# Altium PCB PCB_Rev1.PcbDoc
Units mil, origin at the board's own origin, x right, y up, seen from the top; angles counter-clockwise.
Board outline 1450.12 x 1300 mil, 4 copper layers (Top Layer, GND Plane, PWR Plane, Bottom Layer), stack 61.2 mil thick; 49 components, 39 nets, 240 pads, 78 vias.
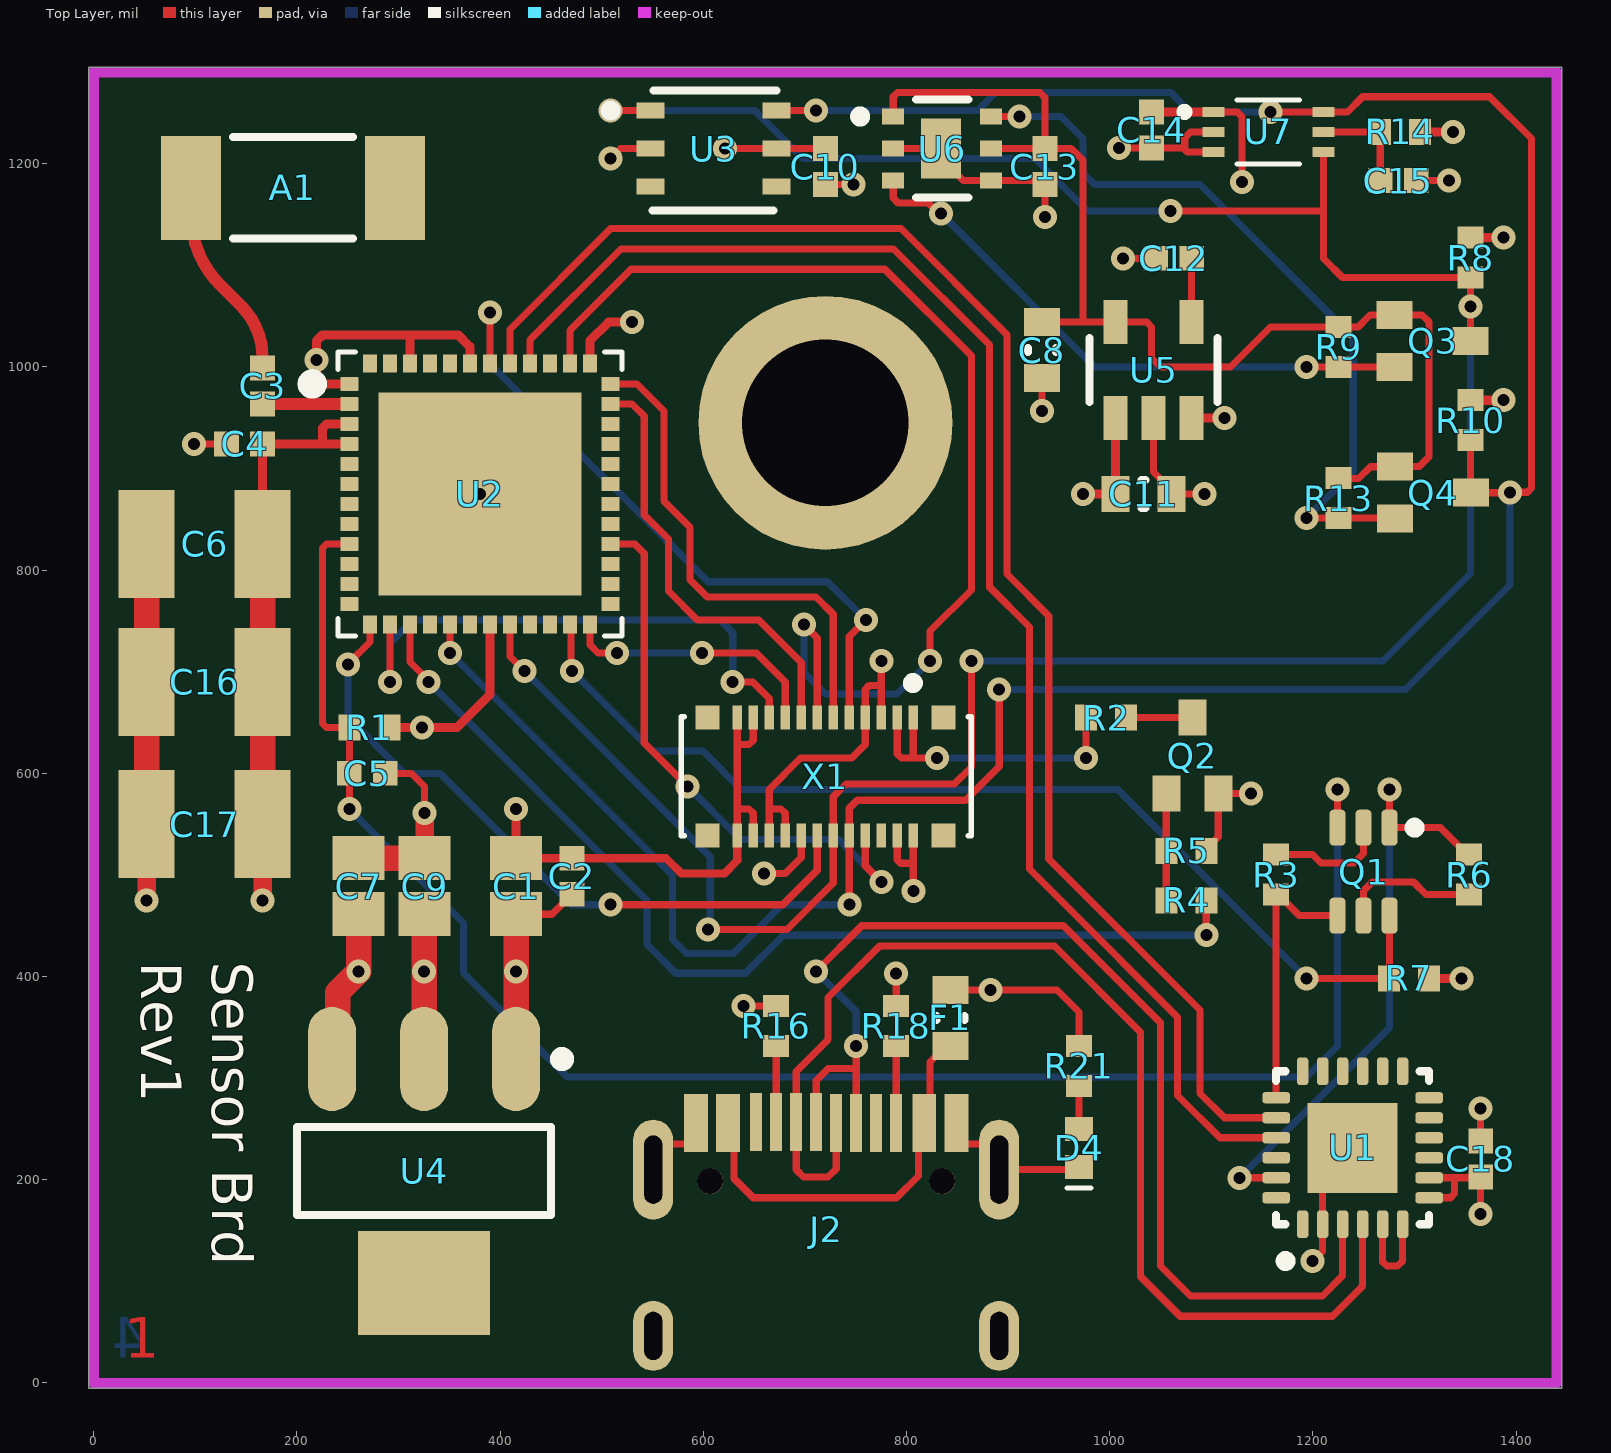
[diagram p0: Top Layer view]
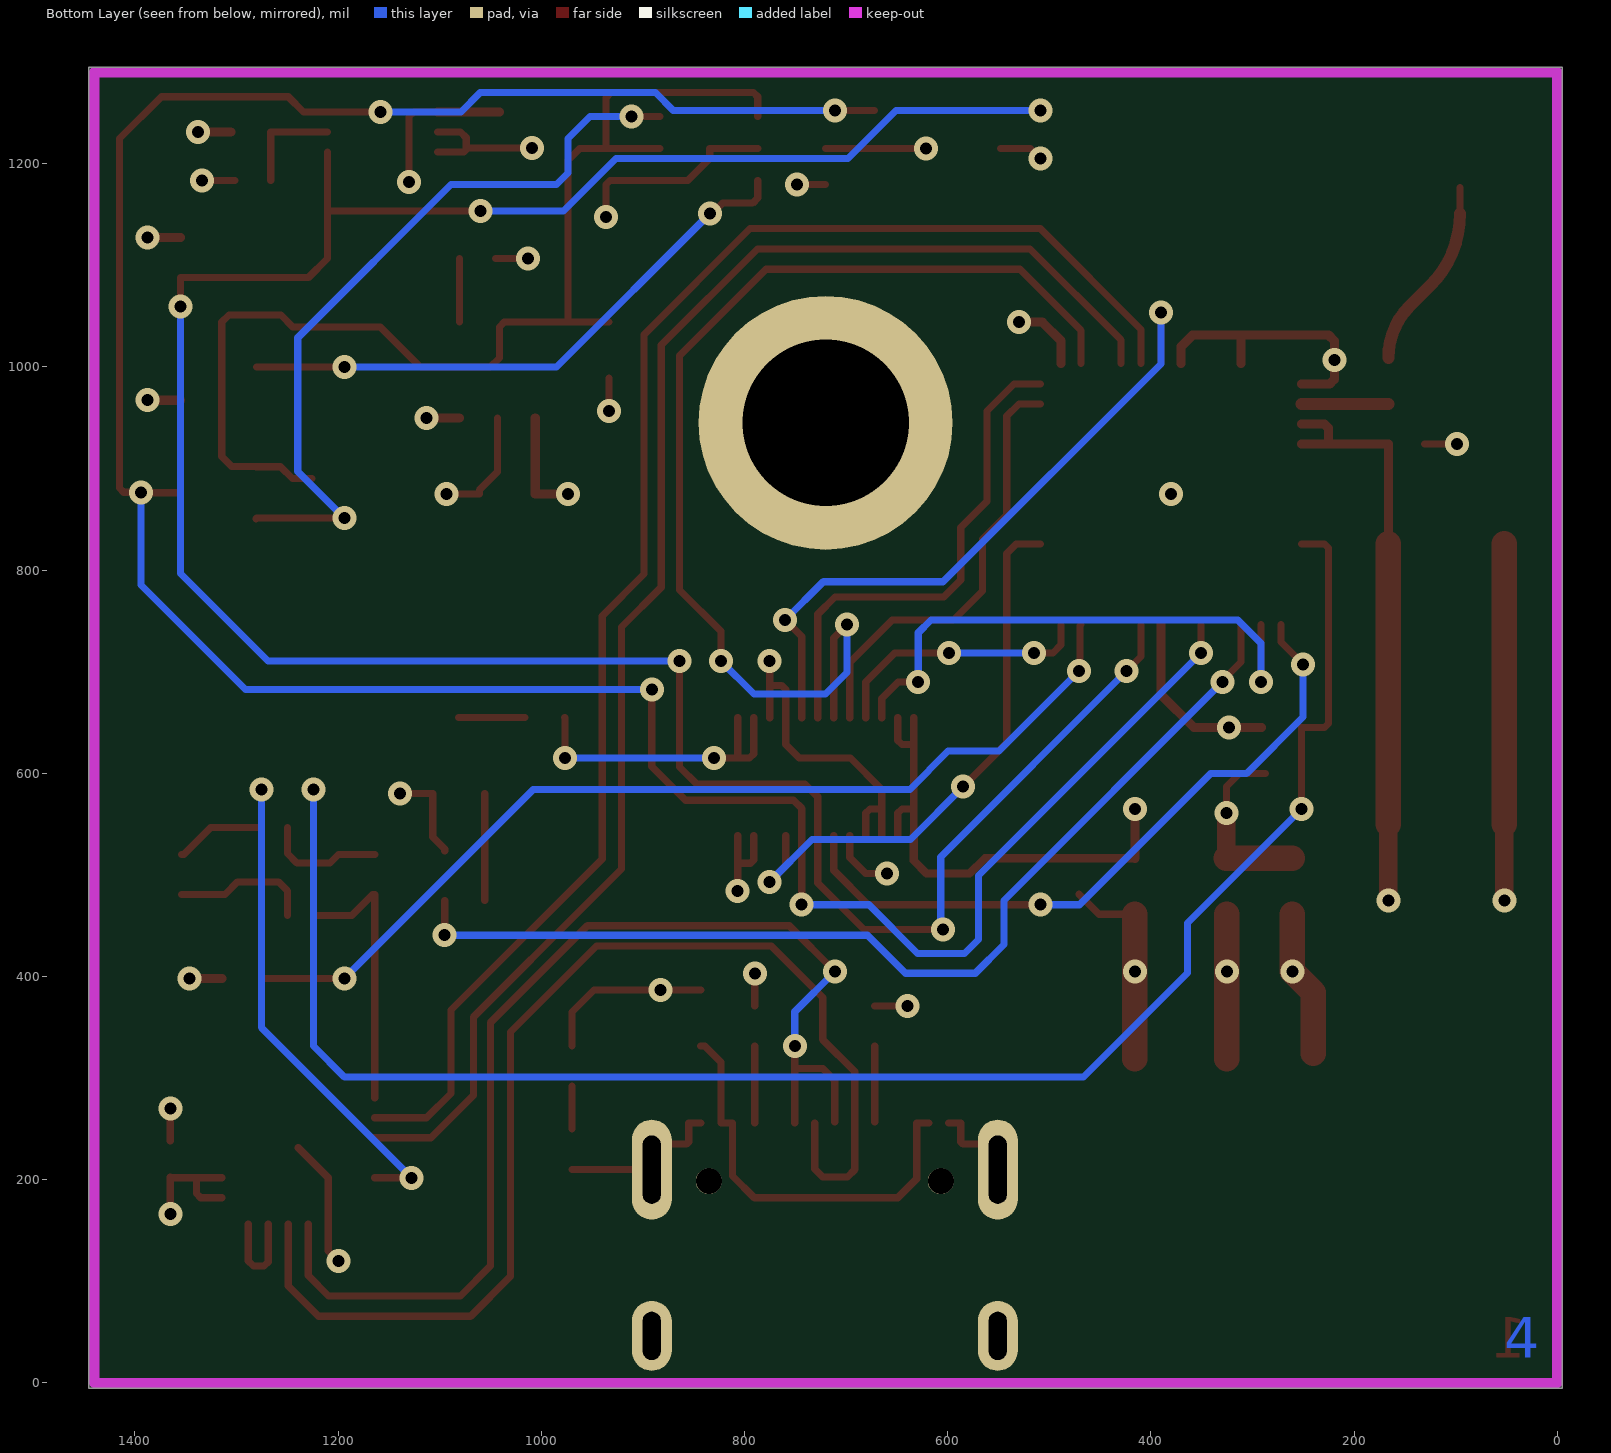
[diagram p1: Bottom Layer view, seen from below]
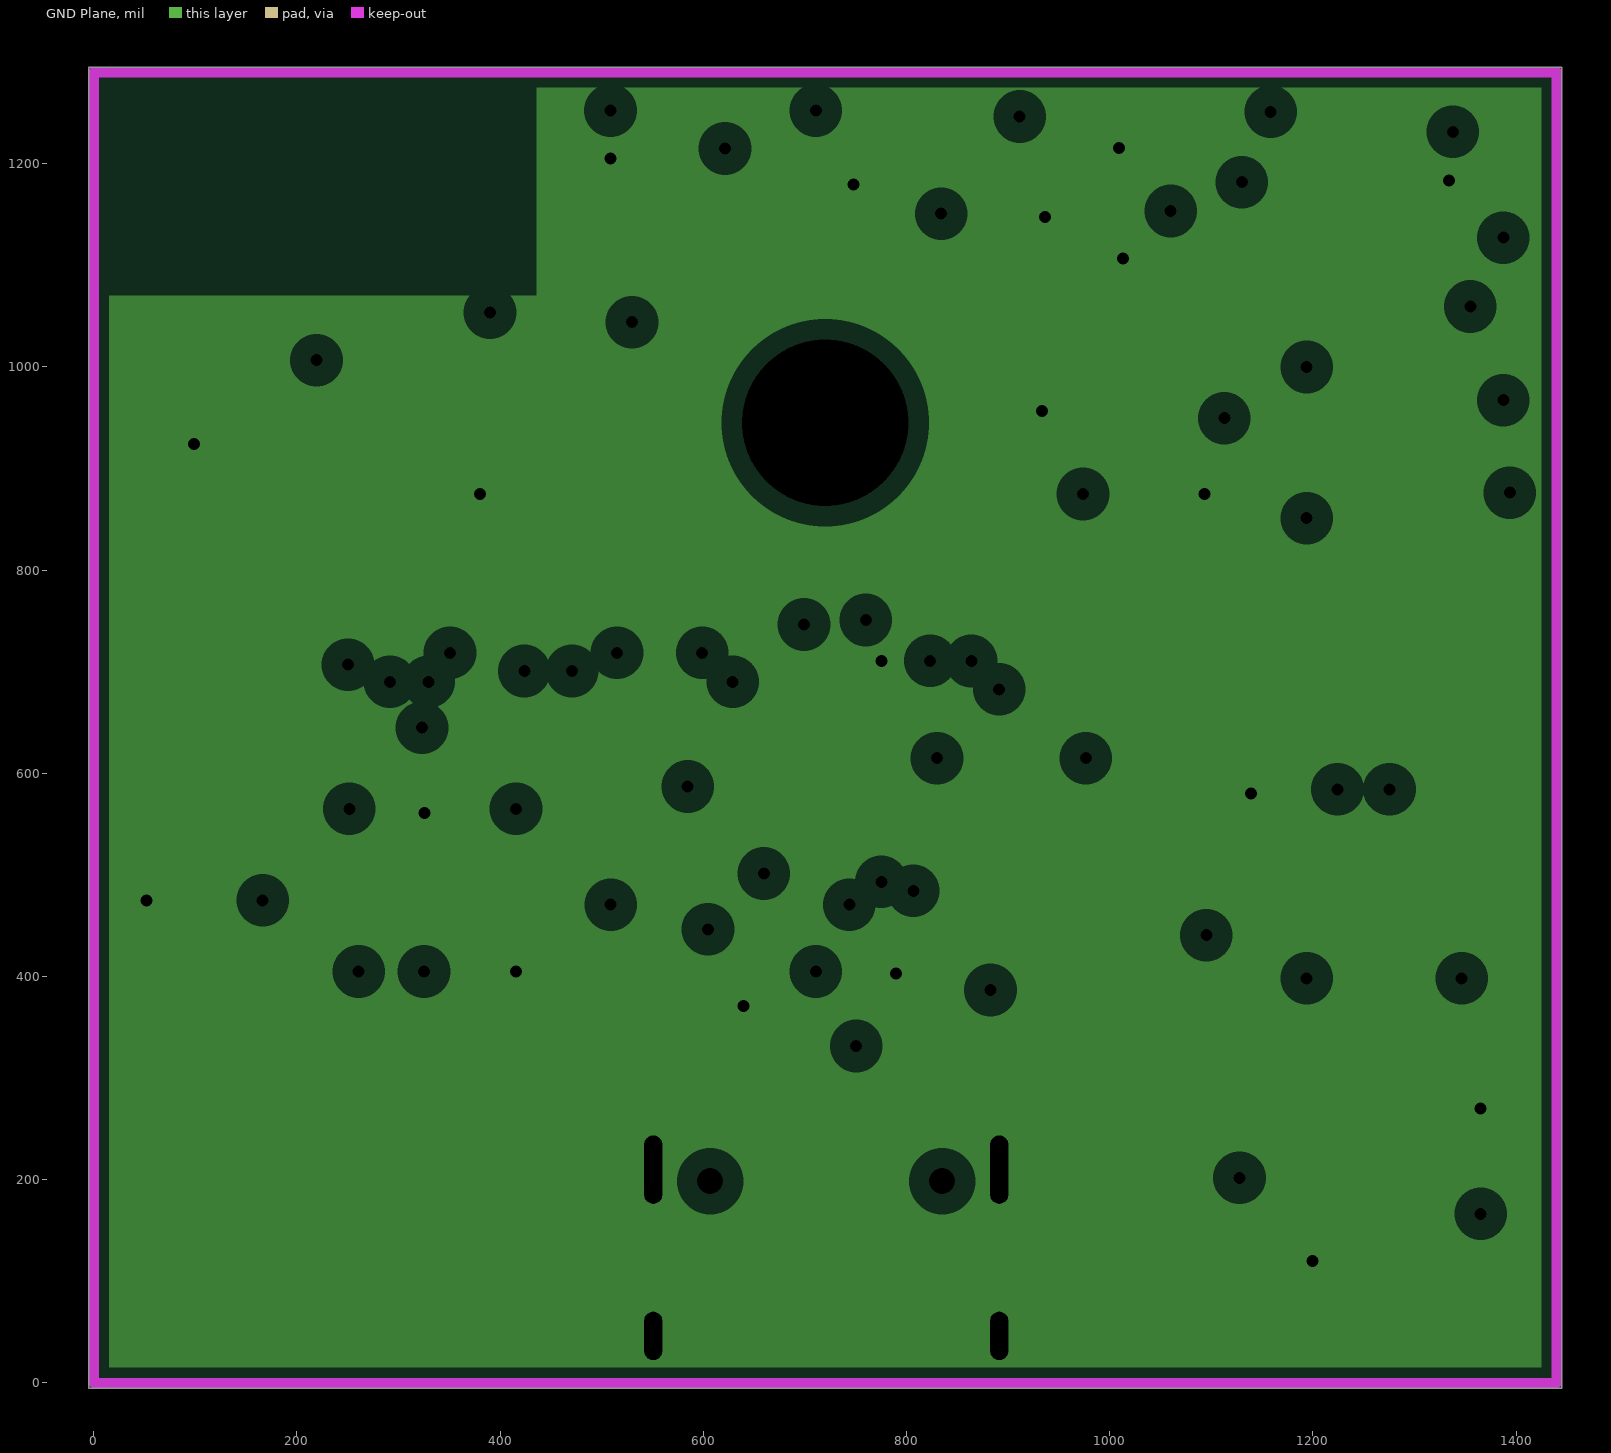
[diagram p2: GND Plane, clearances drawn from the general rule]
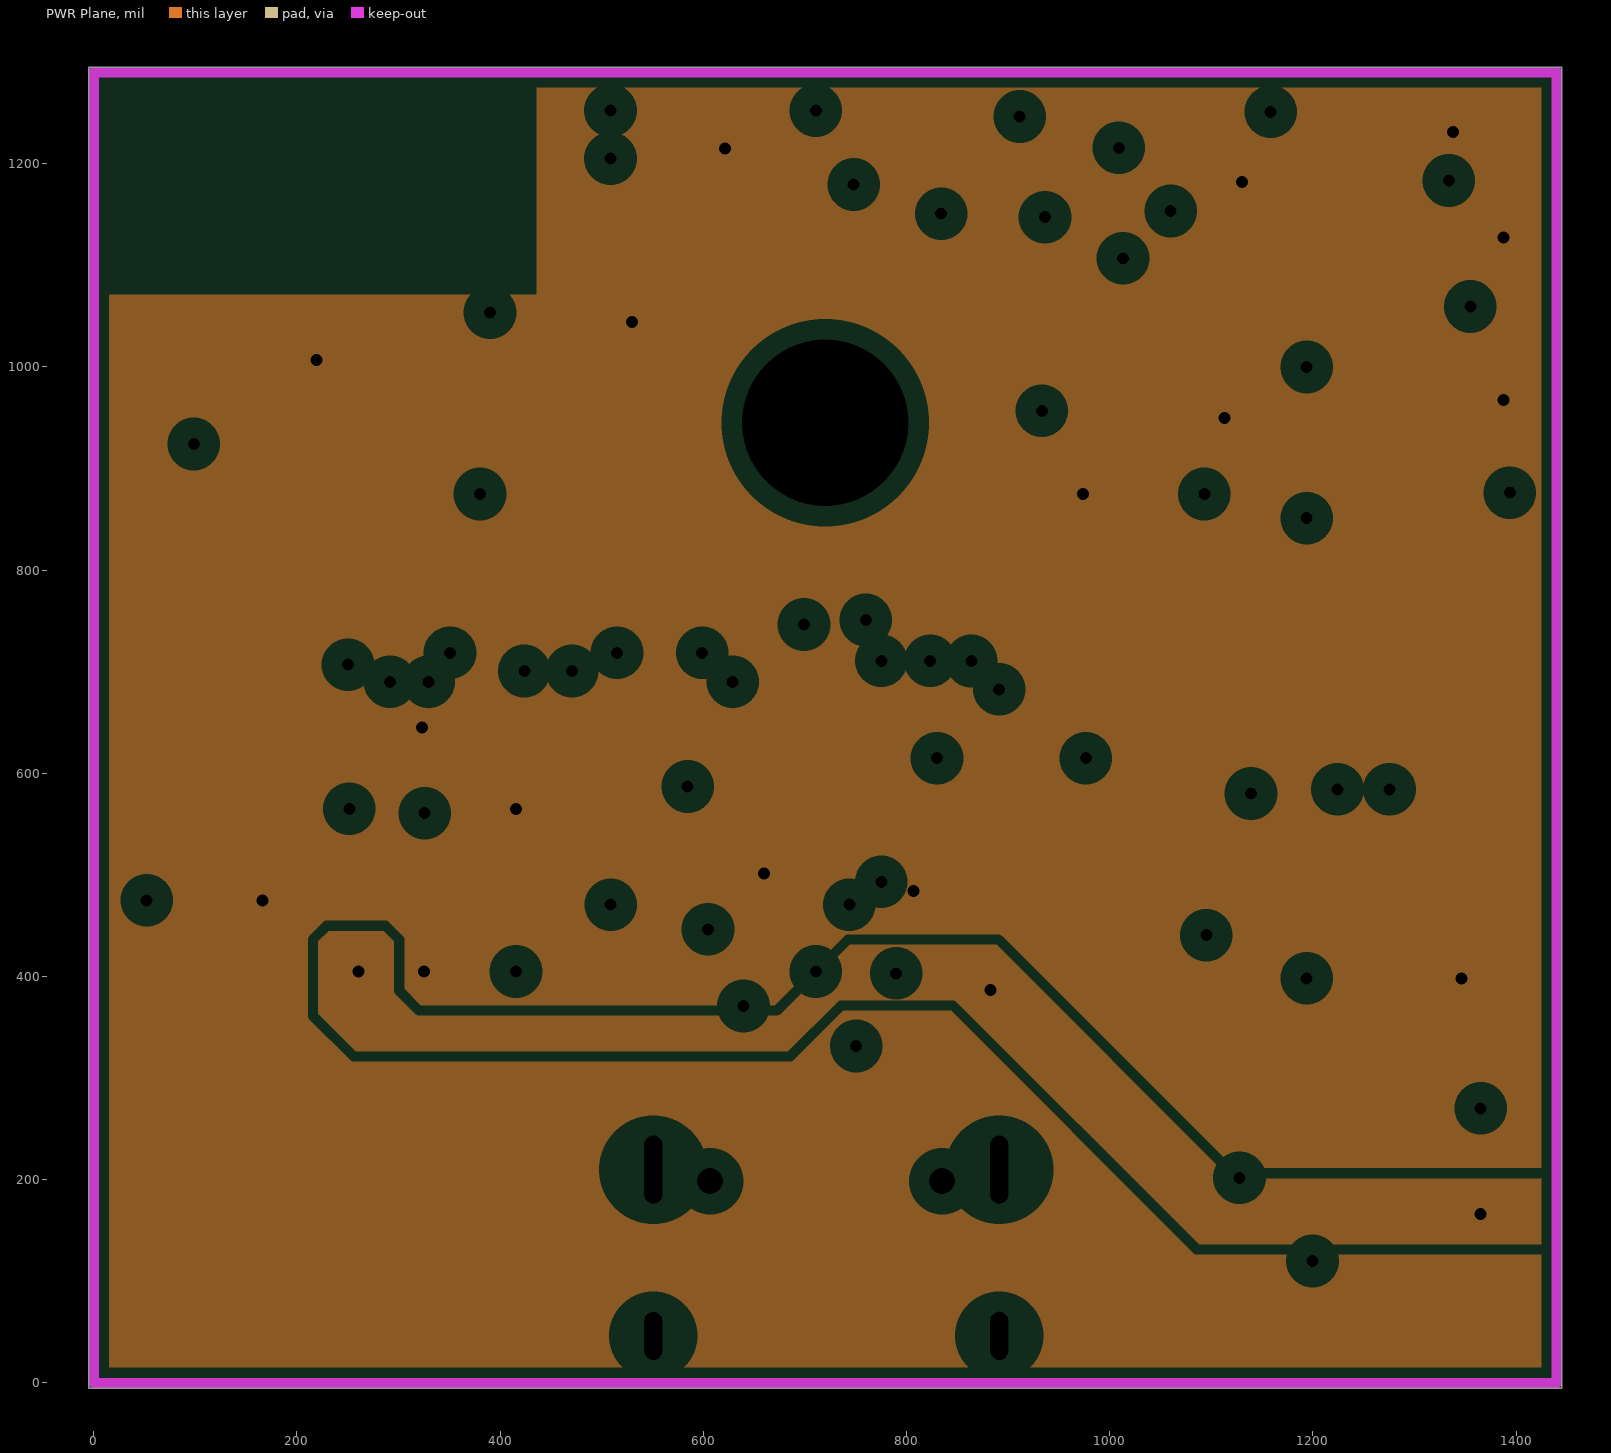
[diagram p3: PWR Plane, clearances drawn from the general rule]
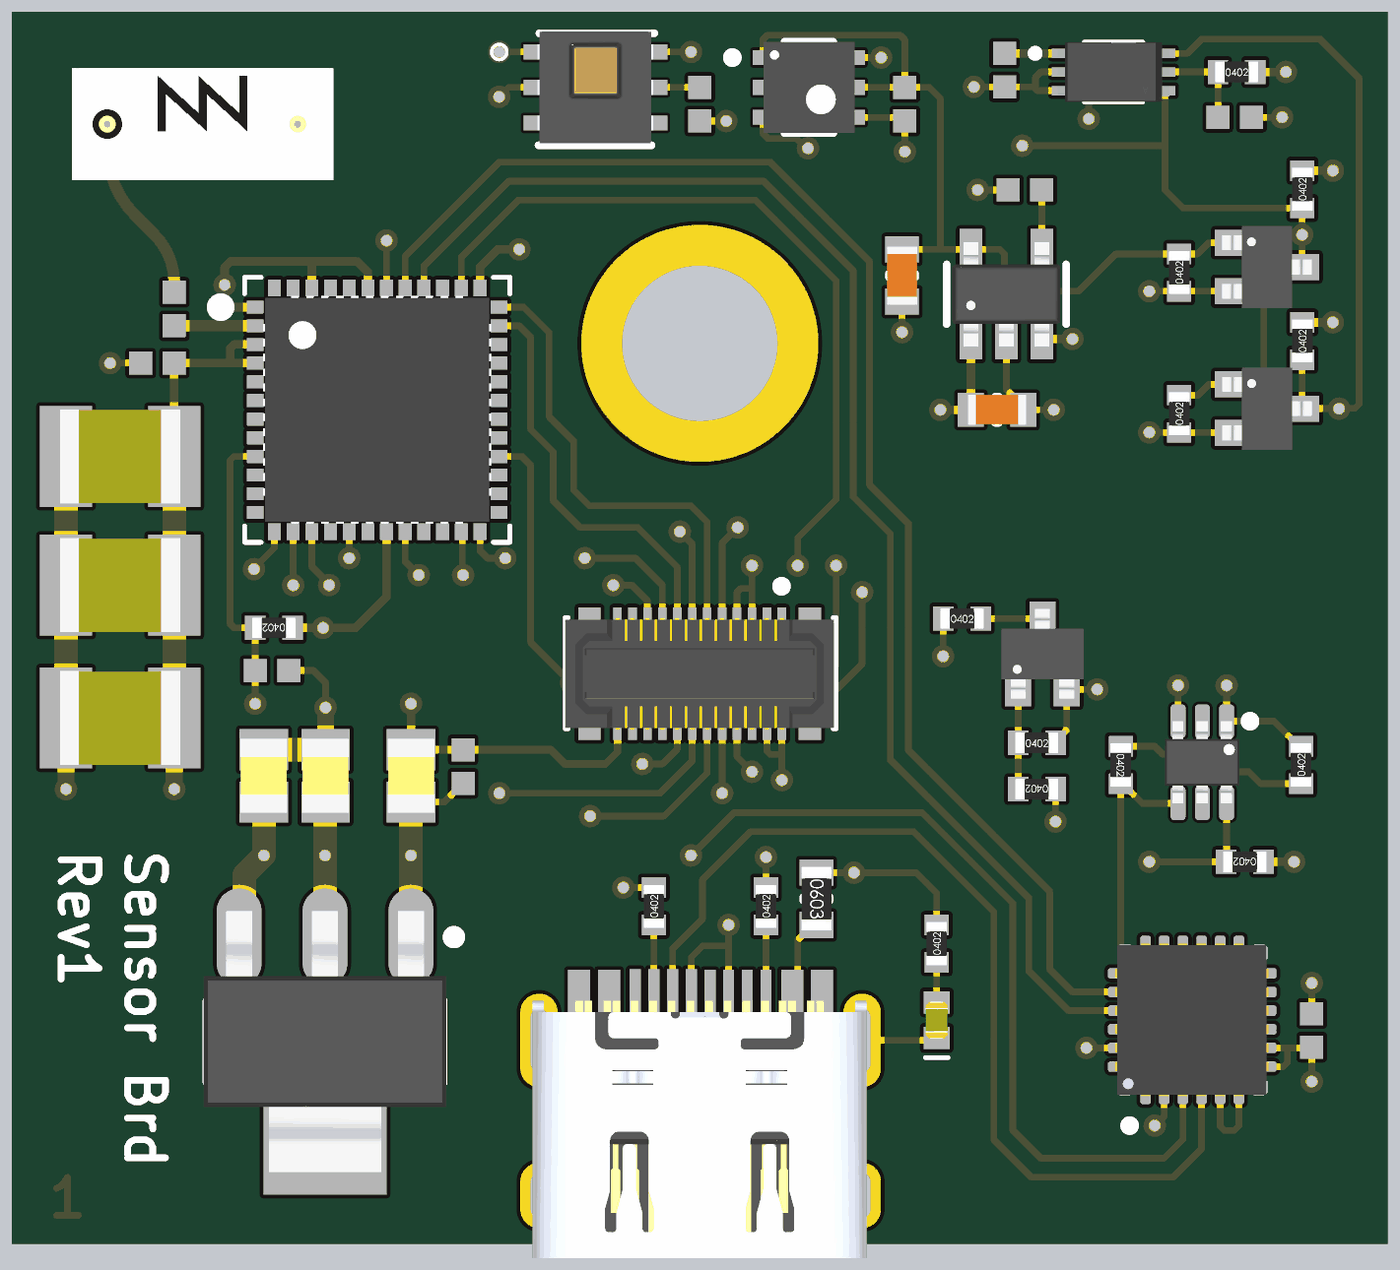
[diagram p4: 3D render of the assembled board from above, using the file's embedded part models]

## Layer stack, top to bottom
Top Solder: solder mask 0.4, Solder Resist, Dk 3.5
Top Layer: signal copper 1.4
Dielectric 2: prepreg 2.8, PP-006, Dk 4.1
GND Plane: plane copper 1.37, net GND
Dielectric 1: dielectric 50.06, FR-4, Dk 4.8
PWR Plane: plane copper 1.37, net +3.3V
Dielectric 3: prepreg 2.8, PP-006, Dk 4.1
Bottom Layer: signal copper 1.4
Bottom Solder: solder mask 0.4, Solder Resist, Dk 3.5

## Board outline
-5,-5 1445,-5 1445.12,-5 1445.12,1295 -4.88,1295 -5,1295

## Design rules (kind name [scope] priority, off if disabled: settings)
Clearance Clearance_X1 [InComponent('X1')] p1: gap=5 ignorepadtopadclearanceinfootprint=FALSE
Clearance Clearance_Q1 [InComponent('Q1')] p2: gap=7 ignorepadtopadclearanceinfootprint=FALSE
Clearance Clearance_U1 [All vs InComponent('U1')] p3: gap=7 ignorepadtopadclearanceinfootprint=FALSE
Clearance Clearance_J2 [InComponent('J2')] p4: gap=7 ignorepadtopadclearanceinfootprint=FALSE
Clearance Clearance_U2 [All vs InComponent('U2')] p5: gap=5 ignorepadtopadclearanceinfootprint=FALSE
Clearance [All] p6: gap=8 ignorepadtopadclearanceinfootprint=FALSE
HoleSize [All] p1: absolutevalues=TRUE maxlimit=200 minlimit=1 maxpercent=80.000 minpercent=20.000
MinimumSolderMaskSliver MinimumSolderMaskSliver_X1 [All vs InComponent('X1')] p1: minsoldermaskwidth=0.6
MinimumSolderMaskSliver [All] p2: minsoldermaskwidth=0.6
PlaneClearance [All] p1: clearance=20
PlaneConnect [All] p1: planeconnectstyle=Direct reliefexpansion=20 reliefentries=4 reliefconductorwidth=10 reliefairgap=10
PolygonConnect PolygonConnect_Via [(IsVia)] p1: connectstyle=Direct reliefconductorwidth=10 reliefentries=4 polygonreliefangle="90 Angle" airgapwidth=10
PolygonConnect [All] p2: connectstyle=Relief reliefconductorwidth=10 reliefentries=4 polygonreliefangle="90 Angle" airgapwidth=10
RoutingVias [All] p1: holewidth=11.81 width=23.62 viastyle="Through Hole" minholewidth=11.81 minwidth=23.62 maxholewidth=11.81 maxwidth=23.62
SilkToSilkClearance [All] p1: silktosilkclearance=5
SilkToSolderMaskClearance [IsPad] p1: minsilkscreentomaskgap=5 clearancetoexposedcopper=TRUE
SolderMaskExpansion [All] p1: expansion=4 istentingtop=FALSE
Width [All] p1: maxlimit=40 minlimit=7 preferedwidth=7
24 further rules are at their usual default settings.

## Components (designator, comment, footprint, x,y, rotation, side; value= is the part's Value field where it differs from the comment)
A1 "Antenna_Chip_1" NN01-102 196.07,1176.34 r0 top value="Chip Antenna"
C1 "10uF" CAPC2012X140N 415.67,488.9 r270 top
C2 "0.1uF" CAPC1005X56N 470.67,498.74 r270 top
C3 "1.5pF" CAPC1005X56N 166.23,981.3 r90 top
C4 "0.1uF" CAPC1005X56N 148.51,924.21 r180 top
C5 "0.1uF" CAPC1005X56N 269.3,600 r0 top
C6 "47uF" CAPC3225X160N 109.14,825.79 r180 top
C7 "10uF" CAPC2012X140N 260.67,488.9 r90 top
C8 "1uF" CAPC1608X09L 933.24,1016.61 r270 top
C9 "10uF" CAPC2012X140N 325.67,488.9 r90 top
C10 "0.1uF" CAPC1005X56N 720.12,1197.28 r270 top
C11 "1uF" CAPC1608X09L 1033.39,875 r0 top
C12 "22nF" CAPC1005X56N 1062.92,1106.92 r180 top
C13 "0.1uF" CAPC1005X56N 936.22,1197.28 r270 top
C14 "0.1uF" CAPC1005X56N 1041.22,1233.31 r270 top
C15 "1uF" CAPC1005X56N 1283.94,1183.5 r0 top
C16 "47uF" CAPC3225X160N 109.14,690 r180 top
C17 "47uF" CAPC3225X160N 109.14,550 r180 top
C18 "1uF" CAPC1005X56N 1365.12,220.46 r90 top
D4 "Green Led" LED1005X40N-Green 969.85,231.18 r90 top
F1 "PTC" "RESC1608X06L (0603 FOOTPRINT)" 843.05,359.21 r270 top
J2 "USB-C" TYPE-C-31-M-12 891.23,54.21 r0 top locked
Q1 "BC847S" SOT65P210X110-6N 1248.83,503.24 r270 top value=2NPN
Q2 "MMST3904" SC-70 1081.23,617.52 r90 top
Q3 "AO7400" SC-70 1317.76,1025.59 r0 top
Q4 "AO7400" SC-70 1317.96,876.18 r0 top
R1 "10K" RESC1005X40L 271.26,645 r180 top
R2 "22R" RESC1005X40L 996.54,654.92 r0 top
R3 "10K" RESC1005X40L 1163.83,500.36 r270 top
R4 "1K" RESC1005X40L 1075.32,474.92 r180 top
R5 "10K" RESC1005X40L 1075.32,523.7 r0 top
R6 "10K" RESC1005X40L 1353.83,500.36 r90 top
R7 "10K" RESC1005X40L 1294.51,398.24 r180 top
R8 "4.7K" "RESC1005X40L (0402 FOOTPRINT)" 1355.16,1107.56 r90 top
R9 "4.7K" "RESC1005X40L (0402 FOOTPRINT)" 1225.36,1019.69 r90 top
R10 "4.7K" "RESC1005X40L (0402 FOOTPRINT)" 1355.16,947.56 r90 top
R13 "4.7K" "RESC1005X40L (0402 FOOTPRINT)" 1225.36,870.87 r90 top
R14 "1K" "RESC1005X40L (0402 FOOTPRINT)" 1285.91,1231.34 r0 top
R16 "5.1K" RESC1005X40L 671.74,351.34 r90 top
R18 "5.1K" RESC1005X40L 789.85,351.34 r90 top
R21 "22K" RESC1005X40L 969.85,311.97 r90 top
U1 "CP2104N" 24-QFN 1239.12,231.46 r90 top
U2 "ESP32-PICO-D4" "QFN48_NEWEST 0.5mm pitch" 380.12,875 r0 top
U3 "HDC1080DMBT" HDC1080 610.12,1215 r0 top locked
U4 "NCP1117ST33T3G" SOT230P700X180-4N 325.12,208.58 r90 top value="3.3V LDO"
U5 "1.8V LDO" SOT95P280X144-5N 1043.24,996.92 r90 top
U6 "SGP30" "DFN-6 (2.45mm X 2.45mm)" 835.12,1215 r0 top
U7 "BH1750FVI" WSOF-6 1156.23,1231.34 r0 top
X1 "LCD Connector" BM10NB(0.8)-24DS-0.4V(51) 720,596.65 r270 top

## Footprints (in the part's own frame and the unit in brackets; to place one, negate y for a bottom-side part, rotate by r counter-clockwise, add the part's x,y. Pads: shape width x height; smd on the part's side, far side on the other; paste and mask are expansions set on the pad)
24-QFN [mm] "24-QFN Exposed Pad (4x4)"
  rrect50% 0.69x0.28 smd: 1(-1.912,1.25) 2(-1.912,0.75) 3(-1.912,0.25) 4(-1.912,-0.25) 5(-1.912,-0.75) 6(-1.912,-1.25) 13(1.913,-1.25) 14(1.913,-0.75) 15(1.913,-0.25) 16(1.913,0.25) 17(1.913,0.75) 18(1.913,1.25)
  rrect50% 0.28x0.69 smd: 7(-1.25,-1.913) 8(-0.75,-1.913) 9(-0.25,-1.913) 10(0.25,-1.913) 11(0.75,-1.913) 12(1.25,-1.913) 19(1.25,1.913) 20(0.75,1.913) 21(0.25,1.913) 22(-0.25,1.913) 23(-0.75,1.913) 24(-1.25,1.913)
  rect 2.25x2.25 smd paste-1.3: 25(0,0)
  silkscreen extent -2.96,-1.91 1.91,1.91, body extent -2.05,-2.04 2.05,2.06, height 1.08
BM10NB(0.8)-24DS-0.4V(51) [mm] "CONN RCPT 24POS SMD GOLD"
  rect 0.6x0.23 smd: 1(-1.475,2.2) 2(-1.475,1.8) 3(-1.475,1.4) 4(-1.475,1) 5(-1.475,0.6) 6(-1.475,0.2) 7(-1.475,-0.2) 8(-1.475,-0.6) 9(-1.475,-1) 10(-1.475,-1.4) 11(-1.475,-1.8) 12(-1.475,-2.2) 13(1.475,-2.2) 14(1.475,-1.8) 15(1.475,-1.4) 16(1.475,-1) 17(1.475,-0.6) 18(1.475,-0.2) 19(1.475,0.2) 20(1.475,0.6) 21(1.475,1) 22(1.475,1.4) 23(1.475,1.8) 24(1.475,2.2)
  rect 0.6x0.6 smd: ""(-1.475,2.95) ""(-1.475,-2.95) ""(1.475,2.95) ""(1.475,-2.95)
  silkscreen extent -2.47,-3.6 1.48,3.65, body extent -1.49,-3.6 1.49,3.6, height 0.8
CAPC1005X56N [mm] "Chip Capacitor, 2-Leads, Body 1.0x0.5mm, IPC Medium Density (0402 ceramic)"
  rect 0.62x0.62 smd: 1(-0.45,0) 2(0.45,0)
  body extent -0.55,-0.3 0.55,0.3, height 0.6
CAPC1608X09L [mm] "Chip Capacitor, 2-Leads, Body 1.6x0.8mm, IPC High Density (0603 dense)"
  rect 0.7x0.9 smd: 1(-0.7,0) 2(0.7,0)
  silkscreen extent -0.05,-0.35 0.05,0.35, body extent -0.89,-0.48 0.88,0.48, height 1.03
CAPC2012X140N [mm] "Chip Capacitor, 2-Leads, Body 2.0x1.3mm, IPC Medium Density (0805 ceramic)"
  rect 1.1x1.3 smd: 1(-0.7,0) 2(0.7,0)
  body extent -1,-0.62 1,0.63, height 1.24
CAPC3225X160N [mm] "Chip Capacitor, 2-Leads, Body 3.2x2.5mm, IPC Medium Density, (1210)"
  rect 1.4x2.7 smd: 1(-1.45,0) 2(1.45,0)
  body extent -1.61,-1.26 1.61,1.26, height 0.62
"DFN-6 (2.45mm X 2.45mm)" [mm] "DFN-6 (2.45mm X 2.45mm)"
  rect 0.55x0.4 smd mask+0.076: 1(-1.225,0.8) 2(-1.225,0) 3(-1.225,-0.8) 5(1.225,0) 6(1.225,0.8)
  rect 0.55x0.4 smd paste+0 mask+0.076: 4(1.225,-0.8)
  rect 1x1.5 smd mask+0.076: 7(-0.025,0)
  silkscreen extent -2.17,-1.22 0.65,1.23, body extent -1.22,-1.22 1.22,1.22, height 0.85
HDC1080 [mm] "Temp/Humidity Sensor"
  rect 0.7x0.4 smd mask+0.076: 1(-1.575,0.95) 2(-1.575,0) 3(-1.575,-0.95) 5(1.575,0) 6(1.575,0.95)
  rect 0.7x0.4 smd paste+0 mask+0.076: 4(1.575,-0.95)
  silkscreen extent -2.7,-1.55 1.57,1.45, body extent -1.55,-1.5 1.55,1.5, height 0.85
LED1005X40N-Green [mm] "Chip LED 2-Leads, Body 1.0x0.5mm, (0402)"
  rect 0.6x0.7 smd: 1(-0.475,0) 2(0.475,0)
  silkscreen extent -1,-0.3 -1,0.3, body extent -0.5,-0.3 0.5,0.3, height 0.2
NN01-102 [mm] "COMPACT REACH XTEND - 102"
  rect 1.5x2.6 smd: 1(-2.55,0) ""(2.55,0)
  silkscreen extent -1.5,-1.27 1.5,1.27, body extent -3.5,-1.5 3.5,1.5, height 2.2
"QFN48_NEWEST 0.5mm pitch" [mm] "QFN, 48-Leads, Body 7x7mm, Pitch 0.5mm, IPC Medium Density"
  rrect9% 0.45x0.35 smd: 1(-3.265,2.75) 2(-3.265,2.25) 3(-3.265,1.75) 4(-3.265,1.25) 5(-3.265,0.75) 6(-3.265,0.25) 7(-3.265,-0.25) 8(-3.265,-0.75) 9(-3.265,-1.25) 10(-3.265,-1.75) 11(-3.265,-2.25) 12(-3.265,-2.75) 25(3.265,-2.75) 26(3.265,-2.25) 27(3.265,-1.75) 28(3.265,-1.25) 29(3.265,-0.75) 30(3.265,-0.25) 31(3.265,0.25) 32(3.265,0.75) 33(3.265,1.25) 34(3.265,1.75) 35(3.265,2.25) 36(3.265,2.75)
  rrect9% 0.35x0.45 smd: 13(-2.75,-3.265) 14(-2.25,-3.265) 15(-1.75,-3.265) 16(-1.25,-3.265) 17(-0.75,-3.265) 18(-0.25,-3.265) 19(0.25,-3.265) 20(0.75,-3.265) 21(1.25,-3.265) 22(1.75,-3.265) 23(2.25,-3.265) 24(2.75,-3.265) 37(2.75,3.265) 38(2.25,3.265) 39(1.75,3.265) 40(1.25,3.265) 41(0.75,3.265) 42(0.25,3.265) 43(-0.25,3.265) 44(-0.75,3.265) 45(-1.25,3.265) 46(-1.75,3.265) 47(-2.25,3.265) 48(-2.75,3.265)
  rect 5.08x5.08 smd paste-4: 49(0,0)
  silkscreen extent -4.37,-3.55 3.55,3.55, body extent -3.05,-3.05 3.05,3.05, height 0.9
RESC1005X40L [mm] "Chip Resistor, 2-Leads, Body 1.0x0.5mm, IPC Medium Density (0402)"
  rect 0.55x0.65 smd: 1(-0.5,0) 2(0.5,0)
  body extent -0.57,-0.27 0.58,0.28, height 0.41
"RESC1005X40L (0402 FOOTPRINT)" [mm] "Chip Resistor, 2-Leads, Body 1.0x0.5mm, IPC Medium Density (0402)"
  rect 0.55x0.65 smd: 1(-0.5,0) 2(0.5,0)
  body extent -0.57,-0.27 0.58,0.28, height 0.41
"RESC1608X06L (0603 FOOTPRINT)" [mm] "Chip Resistor, 2-Leads, Body 1.6x0.8mm, IPC High Density (0603 dense)"
  rect 0.7x0.9 smd: 1(-0.7,0) 2(0.7,0)
  silkscreen extent -0.05,-0.35 0.05,0.35, body extent -0.85,-0.4 0.85,0.4, height 0.56
SC-70 [mm] "SOT23, 3-Leads, Body 2x1.25mm, Pitch 0.65mm"
  rect 0.9x0.7 smd: 1(-0.95,0.65) 2(-0.95,-0.65) 3(0.95,0)
  body extent -1.2,-1.1 1.2,1.1, height 1
SOT65P210X110-6N [mm] "SC70, 6-Leads, Body 2.4x2.2mm (max), Pitch 0.65mm, IPC Medium Density"
  rrect50% 0.9x0.4 smd mask+0.076: 1(-1.1,0.675) 2(-1.1,0.025) 3(-1.1,-0.625) 4(1.1,-0.625) 5(1.1,0.025) 6(1.1,0.675)
  silkscreen extent -1.22,1.18 -0.98,1.43, body extent -1.1,-0.97 1.1,1.01, height 0.99
SOT95P280X144-5N [mm] "SOT23, 5-Leads, Body 3.1x3.0mm (max), Pitch 0.95mm, IPC Medium Density (RFMD SOT23-5)"
  rect 1.1x0.6 smd: 1(-1.2,0.95) 2(-1.2,0) 3(-1.2,-0.95) 4(1.2,-0.95) 5(1.2,0.95)
  silkscreen extent -0.8,-1.6 0.8,1.6, body extent -1.4,-1.45 1.4,1.45, height 1.45
SOT230P700X180-4N [mm] "SOT223, 4-Leads, Body 6.7x7.3mm (max), Pitch 2.30mm, IPC Medium Density"
  oval 2.6x1.2 smd: 1(2.8,-2.3) 2(2.8,0) 3(2.8,2.3)
  rect 2.6x3.3 smd: 4(-2.8,0)
  silkscreen extent -1.1,-3.58 2.92,3.17, body extent -3.5,-3.25 3.5,3.25, height 1.65
TYPE-C-31-M-12 [mm] "USB-C Connector"
  oval 1x1.75 hole 0.45 slot 1.2 at 90 deg: 1(-8.65,-0.2) 1(0,-0.2)
  oval 1x2.5 hole 0.45 slot 1.7 at 90 deg: 1(-8.65,3.955) 1(0,3.955)
  rect 0.3x1.45 smd: A1(-7.726,5.119) A4(-6.926,5.117) A5(-5.575,5.142) A6(-4.575,5.142) A7(-4.075,5.117) A8(-3.075,5.117) A9(-1.727,5.117) A12(-0.924,5.117) B1(-1.224,5.117) B4(-2.021,5.117) B5(-2.575,5.117) B6(-3.575,5.117) B7(-5.075,5.142) B8(-6.075,5.142) B9(-6.626,5.117) B12(-7.426,5.119)
  round 0.65 hole 0.65 unplated: ""(-7.225,3.667) ""(-1.425,3.667)
  body extent -8.82,-1.89 0.12,5.01, height 3.31
WSOF-6 [mm] "WSOF-6"
  rect 0.55x0.25 smd: 1(-1.375,0.5) 2(-1.375,0) 3(-1.375,-0.5) 4(1.375,-0.5) 5(1.375,0) 6(1.375,0.5)
  silkscreen extent -2.2,-0.8 0.78,0.8, body extent -1.5,-0.8 1.5,0.8, height 0.75

## Part data
A1: "Antenna Chip 2.4Gig", Manufacturer=Rainsun, Part_Number=C99665, Vendor=LCSC
C1 C7 C9: library part CAP_0805, "CAP 10uF 0805", Manufacturer=Samsung, PartNumber=C307520, Vendor=LCSC
C2 C4 C5 C10: library part CAP_0402, "CAP 0.1uF 0402", Manufacturer=CCTC, PartNumber=C344190, Vendor=LCSC
C3: library part CAP_0402, "CAP 1.5pF 0402", Manufacturer=Dafron, Part_Footprint=0402, Part_Number=C147344, Vendor=LCSC
C6 C16 C17: library part CAP_1210, "CAP 47uF 1210", Part_Footprint=1210
C8 C11: library part CAP_0603, "CAP 1uF 0603", Part_Footprint=0603
C12: library part CAP_0402, "CAP 22nF 0402", Part_Footprint=0402, Vendor=LCSC
C13 C14: library part CAP_0402, "CAP 0.1uF 0402", Part_Footprint=0402, Vendor=LCSC
C15 C18: library part CAP_0603, "CAP 1uF 16V 0402", Manufacturer=Walsin, PartNumber=C83063, Vendor=LCSC
D4: library part LED_0402_SMALL_GREEN, "LED Green 0402", Part_Footprint=0402, Part_Number=C74338, Vendor=LCSC
F1: library part PTC_FUSE_0603, "PTC FUSE 0.5mA hold, 1A trip 0603", Manufacturer="JDT Fuse", Part_Number=C2982257, Vendor=LCSC
J2: "CONN RECPT USB-C", Manufacturer=KHE, Part_Footprint=SMT, Part_Number=C165948, Vendor=LCSC
Q1: "TRANS 2NPN 44V 0.1A SC-70-6", Manufacturer=Changjiang, PartNumber=BC847S, Vendor=LCSC
Q2: "TRANSISTOR NPN GP 40V SC-70", Manufacturer=Changjiang, Part_Footprint=SC-70, Part_Number=C54879, Vendor=LCSC
Q3 Q4: "MOSFET N-CH 20V 4A SC70-3", Manufacturer="VBSemi Elec", Part_Footprint=SC70-3, Part_Number=AO7400, Vendor=LCSC
R1 R3 R5 R6 R7: library part RES_0402, "RES 10K 0402", Manufacturer=Guangdong, PartNumber=C258091, Vendor=LCSC
R2: library part RES_0402, "RES 22R 0402", Manufacturer=Uniroyal, PartNumber=C25092, Vendor=LCSC
R4 R14: library part RES_0402, "RES 1K 0402", Manufacturer=Yageo, PartNumber=C106235, Vendor=LCSC
R8 R9 R10 R13: library part RES_0402, "RES 4.7K 0402", Vendor=LCSC
R16 R18: library part RES_0603, "RES 5.1K 0402", Vendor=LCSC
R21: library part RES_0603, "RES 22K 0402", Manufacturer="LIZ Elec", PartNumber=C100310, Vendor=LCSC
U1: "IC BRIDGE USB TO UART 24QFN", Manufacturer="Silicon Labs", PartNumber=C47742, Part_Footprint=24QFN, Vendor=LCSC
U2: "WIFI/Bluetooth, QFN-48 7x7", Manufacturer=Espressif, Part_Footprint=QFN48, Part_Number=C193707, Vendor=LCSC
U3: "Humidity/Temperature Sensor", Manufacturer="Texas Instruments", PartNumber=C82227, Vendor=LCSC
U4: "IC REG LDO 1.0A 3.3V SOT-223", Manufacturer="On Semi", PartNumber=C26537, Part_Footprint=SOT-223, Vendor=LCSC
U5: library part RT9193-18GB, "IC REG LDO 1.8V 300mA SOT23-5", Manufacturer="Richtek USA", Part_Footprint=SOT23-5, PartNumber=RT9193-18GB, Vendor=Digi-Key
U6: "TVOC/CO2 Sensor", Manufacturer="Sensirion AG", PartNumber=SGP30-2.5K, Part_Footprint=6-DFN, Vendor=LCSC
U7: "Optical Sensor Ambient I2C 6-SMD", Manufacturer=Rohm, PartNumber=C78960, Part_Footprint=6WSOF, Vendor=LCSC
X1: library part "FFC, FPC 24 pin 0.5mm Con 1.28\" TFT", "FFC, FPC 24 pin 0.4mm Connector for 1.28\" TFT", Manufacturer=Hirose, Part_Footprint=SMD, Part_Number=BM10NB(0.8)-24DS-0.4V(51), Vendor=Digi-Key

## Free pads (board coordinates)
  round 250 hole 164: ""(720.12,945)

## Via types
v1: diameter 23.62, hole 11.81, Top Layer to Bottom Layer, tented both sides, 78 vias

## Nets (pads, with @x,y where several pads share a name; then routed paths per layer and width w, separated by ;. In a path a pad name is that pad's centre, name@x,y a point inside that pad or via, vN(x,y) a via of type N, cw(c..) or ccw(c..) an arc to the next point about the centre after c; other vN are vias at no path point)
+1.8V: C8.1 C13.1 Q3.1 Q4.1 R9.2 R13.2 U5.5 U6.1 U6.5 | length 1148.4
  Top Layer w7: U6.1 786.89,1265.9 790.99,1270 931.23,1270 936.23,1265 C13.1 ; U6.5 C13.1 ; C8.1 973.64,1044.17 ; R9.2 1158.37,1039.37 1119,1000 1050.12,1000 1041.23,1008.9 1041.23,1039.4 1036.46,1044.17 U5.5 973.64,1044.17 ; R9.2 1244.55,1039.4 1256.24,1051.09 1280.27,1051.09 Q3.1 1307.41,1051.18 1314.42,1044.17 1314.42,911.77 1304.67,902.03 1280.81,902.03 Q4.1 1256.53,901.77 1244.84,890.08 R13.2@1225.68,890.08 ; C13.1 962.05,1215 973.64,1203.41 973.64,1044.17
+3.3V: C1.1 C2.1 C4.1 C6.1 C9.1 C10.1 C11.1 C14.1 C16.1 C17.1 R1.1 R7.1 R8.2 R10.2 R14.2 U2.1 U2.3 U2.4 U2.19 U2.37 U2.43 U2.46 U3.5 U4.2 U5.1 U5.3 U7.1 X1.11 X1.12 X1.13 X1.14 X1.17 X1.23 X1.24 | length 2427.7
  Top Layer w7: v1(621.26,1215) U3.5 C10.1 ; X1.13 633.39,565 ; X1.12 633.39,628.31 ; X1.14 649.14,560.9 645.04,565 633.39,565 ; X1.11 649.14,632.41 645.04,628.31 633.39,628.31 ; v1(659.58,501.46) 680.63,501.46 696.38,517.2 X1.17 ; X1.23 790.87,514.77 794.16,511.48 806.62,511.48 ; v1(806.62,484.37) 806.62,511.48 ; X1.24 806.62,511.48 ; U7.1 1125.47,1251.02 1130,1246.5 v1(1130,1181.9) ; 633.39,565 633.39,628.31
  Top Layer w8: C1.1 C2.1 563.34,516.46 578.34,501.46 620.67,501.46 633.39,514.17 X1.13
  Top Layer w9: C6.1 C4.1 225.12,924.21 ; U2.4 225.12,924.21 ; U2.3 229.22,943.9 225.12,939.8 225.12,924.21 ; U2.1 223.86,983.27 219.3,987.83 v1(219.3,1006.73) 219.3,1025.64 225.12,1031.46 311.23,1031.46 ; R1.1 v1(323.14,645) 357.45,645 389.97,677.52 U2.19 ; U2.46 311.23,1031.46 ; U2.43 370.28,1020 358.83,1031.46 311.23,1031.46 ; C1.1 v1(415.67,565) ; U2.37 488.39,1025.74 506.81,1044.17 v1(529.85,1044.17) ; v1(973.64,875) C11.1 U5.1 ; C14.1 U7.1 ; U5.3 v1(1112.83,949.68) ; R14.2 v1(1337.79,1231.34) ; R7.1 v1(1346.39,398.24) ; R10.2 v1(1387.35,967.25) ; R8.2 v1(1387.35,1127.25)
  Top Layer w18: v1(166.23,474.92) C17.1
  Top Layer w25: C17.1 C16.1 C6.1 ; U4.2 v1(325.12,404.96) C9.1@325.12,461.34
C_IRQ: U2.28 X1.21 | length 565.4
  Top Layer w7: U2.28 532.48,825.79 541.83,816.44 541.83,629.83 v1(584.64,587.01) ; X1.21 759.37,508.98 v1(775.12,493.23)
  Bottom Layer w7: v1(584.64,587.01) 636.66,535 733.35,535 v1(775.12,493.23)
C_RST: U2.13 X1.18 | length 683.7
  Top Layer w7: v1@251.58,709.12 271.86,729.39 U2.13 ; v1(508.83,470.67) 678.24,470.67 712.13,504.56 X1.18
  Bottom Layer w7: v1(250.23,706.93) 250.23,655.44 305.67,600 341.02,600 470.35,470.67 v1(508.83,470.67)
D+: J2.A6 J2.B6 U1.3 | length 1138.1
  Top Layer w7: v1(710.83,404.96) 755.87,450 954.65,450 1050.12,354.52 1050.12,115.08 1079.53,85.67 1209.28,85.67 1229.28,105.67 U1.3 ; J2.A6 711.11,297.74 722.95,309.58 750.48,309.58 ; J2.B6 750.48,309.58 ; v1(750.48,331.65) 750.48,309.58
  Bottom Layer w7: v1(710.83,404.96) 750.48,365.31 v1(750.48,331.65)
D-: J2.A7 J2.B7 U1.4 | length 1184.9
  Top Layer w7: J2.A7 730.79,210.67 722.87,202.74 698.6,202.74 691.42,209.92 J2.B7 691.42,306.42 722.87,337.87 722.87,379.28 773.59,430 945.6,430 1030.12,345.48 1030.12,105 1069.45,65.67 1219.12,65.67 1248.97,95.52 U1.4
DTR: Q1.1 R6.2 U1.23 | length 606.8
  Top Layer w7: v1(1127.66,201.93) U1.23 ; v1(1275.4,584.25) Q1.1 1325.36,546.54 1351.86,520.04 R6.2
  Bottom Layer w7: v1(1127.66,201.93) 1275.4,349.67 v1(1275.4,584.25)
EN: C5.1 Q1.3 R1.2 U2.9 | length 1722.6
  Top Layer w7: v1(251.58,565) C5.1 R1.2 229.22,645 225.12,649.1 225.12,821.69 229.22,825.79 U2.9 ; Q1.3 v1(1224.22,584.25)
  Bottom Layer w7: v1(251.58,565) 363.83,452.75 363.83,403.5 466.15,301.18 1193.83,301.18 1224.22,331.57 v1(1224.22,584.25)
GND: C1.2 C2.2 C4.2 C5.2 C6.2 C7.2 C8.2 C9.2 C10.2 C11.2 C12.2 C13.2 C14.2 C15.2 C16.2 C17.2 C18.2 D4.1 J2.1 J2.A1 J2.A12 J2.B1 J2.B12 Q2.2 R5.2 R16.2 R18.2 U1.2 U1.25 U2.49 U3.2 U4.1 U5.2 U6.2 U6.4 U6.7 U7.2 U7.3 X1.3 X1.4 X1.15 X1.16 | length 2281
  Top Layer w7: v1(98.6,924.21) C4.2 ; C5.2 312.69,600 325.67,587.01 v1(325.67,560.9) ; C1.2 450.99,461.34 C2.2 ; v1(508.67,1205.16) 518.51,1215 U3.2 ; J2.1@550.67,209.92 550.67,220.05 565.63,235 584.64,235 587.05,237.41 J2.A1 J2.B12 ; v1(639.54,371.02) R16.2 ; X1.15 664.89,565 ; X1.16 680.63,560.9 676.53,565 664.89,565 ; C10.2 v1(748.04,1179.57) ; X1.3 775.12,686.63 ; v1(775.12,710.67) 775.12,686.63 ; U6.2 U6.7 834.14,1205.16 855.79,1183.5 U6.4 932.29,1183.5 C13.2 v1(936.23,1147.37) ; R18.2 v1(789.85,403.22) ; J2.B1 J2.A12 854.85,237.41 857.26,235 876.27,235 891.23,220.05 891.23,209.92 D4.1@969.85,209.92 ; v1(933.24,956.86) C8.2 ; v1(1009.03,1215.59) C14.2 1072.25,1215.59 1073.83,1214.02 ; v1(1013.01,1106.92) C12.2 ; U5.2 1043.24,896.65 1060.95,878.94 C11.2 v1(1093.15,875) ; R5.2 1095,525.67 1106.82,537.48 Q2.2 v1(1139.01,580.12) ; U7.3 1076.19,1211.65 1073.83,1214.02 ; U7.2 1079.49,1231.34 1073.83,1225.67 1073.83,1214.02 ; v1(1199.62,120) 1209.6,129.98 U1.2 1209.6,201.93 U1.25 ; C15.2 v1(1333.85,1183.5) ; C18.2 v1(1365.12,270.37) ; 664.89,565 664.89,584.25 695.63,615 746.07,615 759.37,628.31 X1.4 759.37,682.64 763.37,686.63 775.12,686.63
  Top Layer w18: v1(52.05,474.92) C17.2 ; C9.2 v1(325.67,560.9) v1@325.67,562.42
  Top Layer w25: C17.2 C16.2 C6.2 ; C7.2 C9.2 ; U4.1 v1(415.67,404.96) C1.2
  other v1: 380.12,875
IO0: Q1.6 R7.2 U2.23 | length 1038
  Top Layer w7: U2.23 469.69,745.47 469.69,701.66 v1(470.67,700.67) ; v1(1193.83,398.24) R7.2 1275.4,398.81 Q1.6
  Bottom Layer w7: v1(470.67,700.67) 549.5,621.85 599.53,621.85 637.13,584.25 1007.81,584.25 v1(1193.83,398.24)
LCD_BL: R4.1 U2.15 | length 1024.3
  Top Layer w7: U2.15 311.23,709.65 v1@330.91,689.96 ; v1(1095,440.67) R4.1
  Bottom Layer w7: v1(329.49,690.08) 544.58,474.98 544.58,431.46 572.82,403.22 641.34,403.22 678.8,440.67 v1(1095,440.67)
NetA1_1: A1.1 C3.2 | length 189.1
  Top Layer w7: A1.1@95.67,1150.87 A1.1
  Top Layer w12: A1.1@95.67,1150.87 ccw(c195.67,1150.87) 124.96,1080.16 145.13,1060 cw(c94.18,1009.05) C3.2@166.23,1009.05
NetC3_1: C3.1 U2.2 | length 85.4
  Top Layer w12: C3.1 U2.2
NetC12_1: C12.1 U5.4 | length 62.8
  Top Layer w7: U5.4 C12.1
NetC15_1: C15.1 R14.1 U7.5 | length 103.7
  Top Layer w7: U7.5 R14.1 C15.1
NetD4_2: D4.2 R21.1 | length 42.4
  Top Layer w7: D4.2 R21.1
NetF1_2: F1.2 J2.A4 J2.A9 J2.B4 J2.B9 | length 414.5
  Top Layer w7: J2.A4 J2.B9 630.35,201.04 649.14,182.25 790.28,182.25 811.65,203.61 J2.B4 J2.A9 823.25,315.79 839.11,331.65 F1.2
NetJ2_A5: J2.A5 R16.1 | length 75
  Top Layer w7: J2.A5 R16.1
NetJ2_B5: J2.B5 R18.1 | length 76
  Top Layer w7: J2.B5 R18.1
NetQ1_2: Q1.2 R3.1 | length 118.8
  Top Layer w7: R3.1 1199.62,520.04 1207.88,511.78 1240.56,511.78 1249.81,521.03 Q1.2
NetQ1_5: Q1.5 R6.1 | length 137.3
  Top Layer w7: Q1.5 1249.81,484.37 1258.67,493.23 1298.8,493.23 1311.36,480.67 R6.1
NetQ2_1: Q2.1 R4.2 R5.1 | length 105.2
  Top Layer w7: R4.2 R5.1 Q2.1
NetQ2_3: Q2.3 R2.2 | length 65
  Top Layer w7: R2.2 Q2.3
NetR2_1: R2.1 X1.1 X1.2 | length 302.7
  Top Layer w7: X1.2 790.87,619.1 794.97,615 806.62,615 ; X1.1 806.62,615 ; v1@830,615 806.62,615 ; v1(976.51,615) 976.51,654.57 R2.1
  Bottom Layer w7: v1(830,615) v1(976.51,615)
NetU1_5: U1.5 U1.6 | length 96.7
  Top Layer w7: U1.5 1268.65,119.1 1272.75,115 1283.34,115 1288.34,120 U1.6
RTS: Q1.4 R3.2 U1.19 | length 269
  Top Layer w7: U1.19 R3.2 1165.8,480.67 1186.54,459.93 Q1.4
RXD: U1.21 U2.40 | length 1481.4
  Top Layer w7: U2.40 429.34,1026.69 518.83,1116.18 787.23,1116.18 881.83,1021.58 881.83,783.17 920.97,744.03 920.97,505.89 951.93,474.92 1066.86,360 1066.86,283 1108.56,241.3 U1.21
SCL: Q4.3 R10.1 U2.17 U3.6 U7.6 X1.20 | length 2810.3
  Top Layer w7: v1(350.6,718.54) U2.17 ; U3.6 v1(710.83,1252.4) ; v1(743.63,470.67) X1.20 743.63,565.59 751.58,573.54 857.97,573.54 891.23,606.8 v1(891.23,682.64) ; v1(1158.37,1251.02) U7.6 1234.09,1251.02 1248.97,1265.9 1373.86,1265.9 1415.01,1224.75 1415.01,880.75 1410.91,876.65 1394.3,876.65 v1(1393.83,876.18) Q4.3 1355.16,876.38 R10.1
  Bottom Layer w7: v1(350.6,718.54) 569.58,499.56 569.58,436.46 583.34,422.7 629.53,422.7 677.5,470.67 v1(743.63,470.67) ; v1(710.83,1252.4) 870.05,1252.4 887.65,1270 1060.01,1270 1078.99,1251.02 v1(1158.37,1251.02) ; v1(891.23,682.64) 1291.15,682.64 1393.83,785.32 v1(1393.83,876.18)
SCL_CO2: Q4.2 R13.1 U6.6 | length 749.9
  Top Layer w7: U6.6 v1(911.26,1246.5) ; v1(1193.83,851.18) R13.1 1279.97,851.18 Q4.2
  Bottom Layer w7: v1(911.26,1246.5) 952.01,1246.5 973.64,1224.87 973.64,1190.93 985.01,1179.57 1088.86,1179.57 1239.7,1028.72 1239.7,897.05 v1(1193.83,851.18)
SDA: Q3.3 R8.1 U2.20 U3.1 U7.4 X1.19 | length 2753.4
  Top Layer w7: U2.20 409.65,714.85 v1(423.83,700.67) ; v1(508.67,1252.4) U3.1 ; v1(604.58,446.46) 682.36,446.46 727.88,491.97 X1.19 727.88,576.93 740.49,589.54 846.97,589.54 863.83,606.41 v1@863.83,710.55 ; v1(1059.97,1153.54) 1210.36,1153.54 ; U7.4 1210.36,1153.54 ; Q3.3 1354.97,1025.79 v1(1354.97,1059.54) 1354.97,1087.68 R8.1 1229.28,1087.88 1210.36,1106.8 1210.36,1153.54
  Bottom Layer w7: v1(423.83,700.67) 606.78,517.72 606.78,448.65 v1(604.58,446.46) ; v1(508.67,1252.4) 650.67,1252.4 697.92,1205.16 926.42,1205.16 978.04,1153.54 v1(1059.97,1153.54) ; v1@863.97,710.67 1268.83,710.67 1354.97,796.81 v1(1354.97,1059.54)
  other v1: 863.75,710.62
SDA_CO2: Q3.2 R9.1 U6.3 | length 579.4
  Top Layer w7: U6.3 786.89,1166.18 791.89,1161.18 821.73,1161.18 831.87,1151.04 v1@833.97,1151.04 ; v1(1193.83,1000) R9.1 Q3.2
  Bottom Layer w7: v1(834.14,1150.87) 985.01,1000 v1(1193.83,1000)
SPI_CLK: U2.35 X1.8 | length 434.5
  Top Layer w7: U2.35 529.85,963.58 541.83,951.61 541.83,854.32 565.63,830.52 565.63,779.38 594.09,750.92 654.58,750.92 696.38,709.12 X1.8
SPI_MISO: U2.38 X1.7 | length 1095.8
  Top Layer w7: U2.38 468.71,1036.06 528.83,1096.18 778.62,1096.18 863.83,1010.97 863.83,780.61 823.25,740.03 v1(823.25,710.67) ; v1(699.02,746.46) 712.13,733.34 X1.7
  Bottom Layer w7: v1(699.02,746.46) 699.02,699.22 720.12,678.12 790.69,678.12 v1(823.25,710.67)
SPI_MOSI: U2.36 X1.6 | length 497.2
  Top Layer w7: U2.36 534.65,983.27 561.32,956.61 561.32,867.86 587.05,842.13 587.05,790.45 603.83,773.67 710.83,773.67 727.88,756.62 X1.6
TFT_CS: U2.24 X1.9 | length 262.5
  Top Layer w7: U2.24 488.39,726.61 496.45,718.54 v1(515,718.54) ; v1(598.85,718.54) 652.05,718.54 680.63,689.96 X1.9
  Bottom Layer w7: v1(515,718.54) v1(598.85,718.54)
TFT_DC: U2.42 X1.5 | length 677.9
  Top Layer w7: U2.42 v1(389.97,1053.54) ; X1.5 743.63,734.55 v1(760,750.92)
  Bottom Layer w7: v1(389.97,1053.54) 389.97,1003.04 604.47,788.54 722.37,788.54 v1(760,750.92)
TFT_RST: U2.14 X1.10 | length 556.7
  Top Layer w7: v1(291.54,690) U2.14 ; v1(628.94,690) 648.69,690 664.89,673.8 X1.10
  Bottom Layer w7: v1(291.54,690) 291.54,728.03 314.43,750.92 616.38,750.92 628.94,738.35 v1(628.94,690)
TXD: U1.20 U2.41 | length 1517.4
  Top Layer w7: U2.41 409.65,1037 508.83,1136.18 794.41,1136.18 898.83,1031.76 898.83,796.17 940,755 940,515.84 1088.83,367.01 1088.83,284.99 1112.83,260.99 U1.20
VUSB: C7.1 C18.1 F1.1 R21.2 U1.7 U1.8 U4.3 | length 455.5
  Top Layer w7: U4.3 U4.3@240.01,324.25 ; F1.1 v1(882.64,386.77) ; v1@885.12,384.29 v1(882.64,386.77) ; R21.2 969.85,365.12 948.2,386.77 v1(882.64,386.77) ; U1.7 1335.12,182.25 1339.36,186.49 1339.36,201.93 ; U1.8 1339.36,201.93 ; v1(1365.12,166.46) C18.1 1364.31,201.93 1339.36,201.93
  Top Layer w25: U4.3@240.01,324.25 240.01,384.29 v1(260.67,404.96) C7.1
pads on no net: A1. J2. J2.A8 J2.B8 U1.1 U1.9 U1.10 U1.11 U1.12 U1.13 U1.14 U1.15 U1.16 U1.17 U1.18 U1.22 U1.24 U2.5 U2.6 U2.7 U2.8 U2.10 U2.11 U2.12 U2.16 U2.18 U2.21 U2.22 U2.25 U2.26 U2.27 U2.29 U2.30 U2.31 U2.32 U2.33 U2.34 U2.39 U2.44 U2.45 U2.47 U2.48 U3.3 U3.4 U4.4 X1. X1.22

## Polygon pours and split planes (outlines as drawn)
GND on GND Plane (split plane): 1425.03,1274.9 1425.02,15.1 15.1,15.1 15.1,1070.67 435.67,1070.67 435.67,1274.9
+3.3V on PWR Plane (split plane): 1425.03,1274.9 1425.02,211.55 1122.79,211.55 894.28,440.06 892.62,441.17 890.67,441.55 742.37,441.55 740.42,441.17 738.76,440.06 670.26,371.55 322.23,371.55 305.77,388.02 305.77,426.46 305.77,436.46 305.38,438.41 304.28,440.06 290.74,453.6 289.08,454.71 287.13,455.1 229.22,455.1 227.27,454.71 225.61,453.6 212.07,440.06 210.96,438.41 210.58,436.46 210.58,361.46 210.96,359.51 212.07,357.85 252.07,317.85 253.72,316.75 255.67,316.36 685.67,316.36 687.62,316.75 689.28,317.85 737.79,366.36 843.56,366.36 1082.07,127.85 1083.72,126.75 1085.67,126.36 1425.02,126.36 1425.02,15.1 15.1,15.1 15.1,1071.46 435.46,1071.46 435.46,1274.9
VUSB on PWR Plane (split plane): 295.58,434.35 295.58,426.46 295.58,385.91 295.96,383.95 297.07,382.3 316.52,362.85 318.17,361.75 320.12,361.36 672.37,361.36 674.32,361.75 675.97,362.85 744.48,431.36 888.56,431.36 1117.07,202.85 1118.72,201.75 1120.67,201.36 1425.02,201.36 1425.02,136.55 1087.79,136.55 849.28,375.06 847.62,376.17 845.67,376.55 735.67,376.55 733.72,376.17 732.07,375.06 683.56,326.55 257.79,326.55 220.77,363.57 220.77,434.35 231.33,444.9 285.02,444.9

## Keep-outs
Keep-Out Layer:
  lines w10: 0,0 1440,0 1440,1290 0,1290 0,0

## Other copper
Top Layer:
  text "1" at 30,25 h40
Bottom Layer:
  text "4" at 52.05,25 h40
GND Plane (plane layer: these items are gaps in the copper):
  pour cut-out: 435.67,1070.67 435.67,1295 -5,1295 -5,1070.67
  text "2" at 25,25 h40
PWR Plane (plane layer: these items are gaps in the copper):
  pour cut-out: 435.46,1071.46 435.46,1295.78 -5.21,1295.78 -5.21,1071.46
  lines w10: 1445.67,131.46 1085.67,131.46 845.67,371.46 735.67,371.46 685.67,321.46 255.67,321.46 215.67,361.46 215.67,436.46 229.22,450 287.13,450 300.67,436.46 300.67,426.46 300.67,385.91 320.12,366.46 672.37,366.46 742.37,436.46 890.67,436.46 1120.67,206.46 1445.67,206.46
  text "3" at 25,25 h40

## Silkscreen, mask and mechanical layers (free items; w line width, h text height)
Top Overlay:
  text "Rev1" at 46.58,414.46 h40 r270
  text "Sensor Brd" at 116.58,414.46 h40 r270
Mechanical 1:
  lines w10: 0,0 0,1290 1440,1290 1440,0 0,0